# Allegro board DEV_SUB_SENSOR_BRD_V1_1-20170606.brd
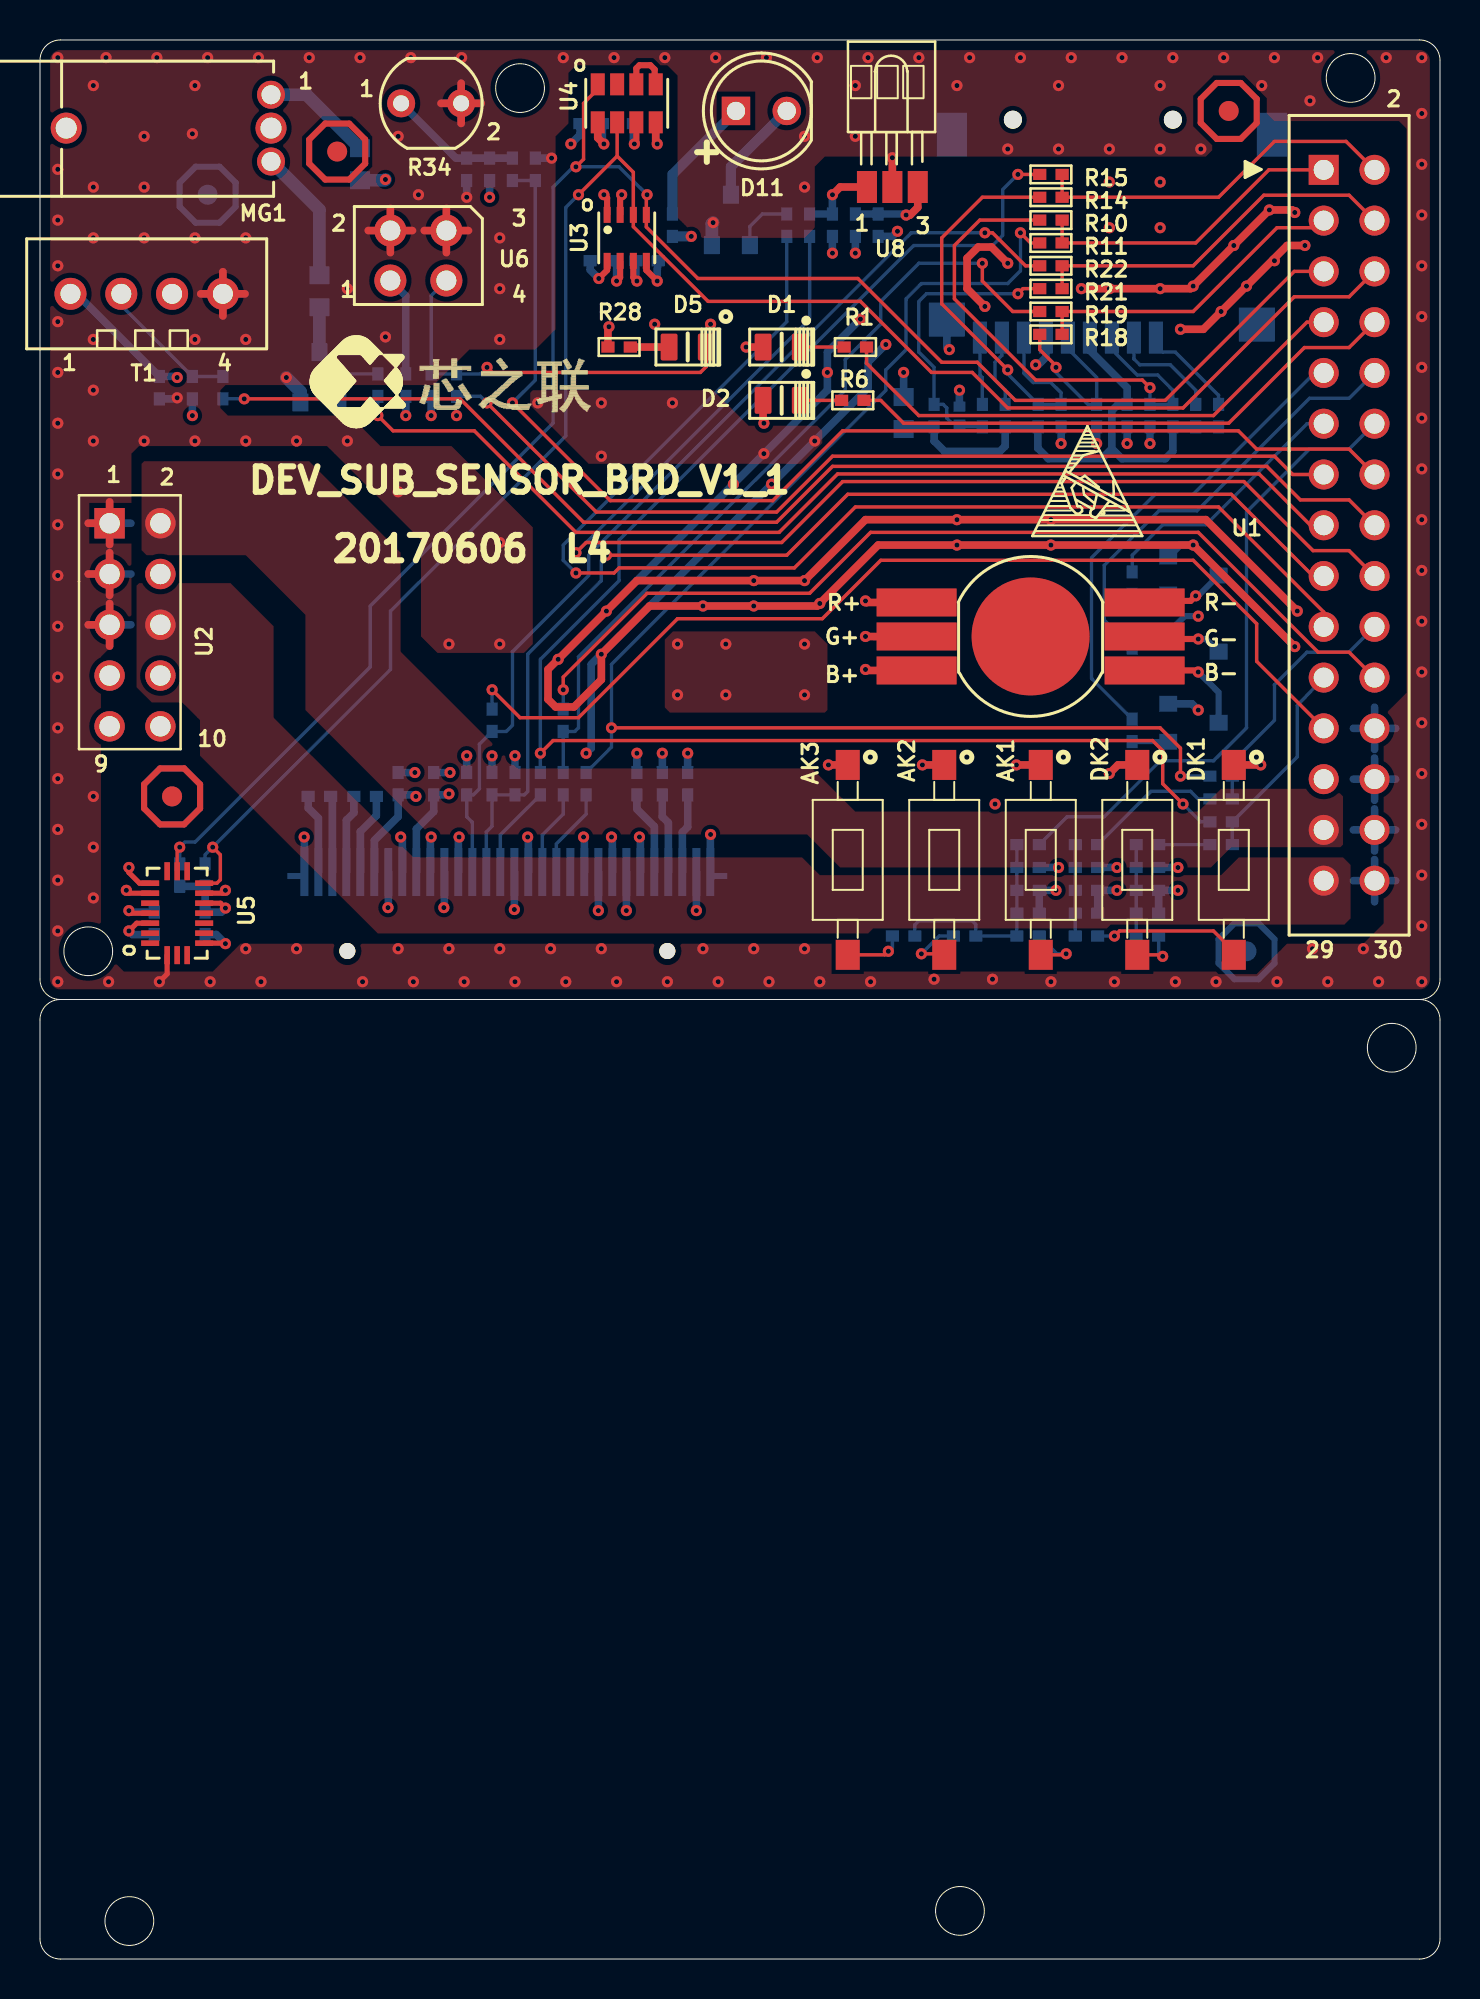
[diagram p0: board, top side]
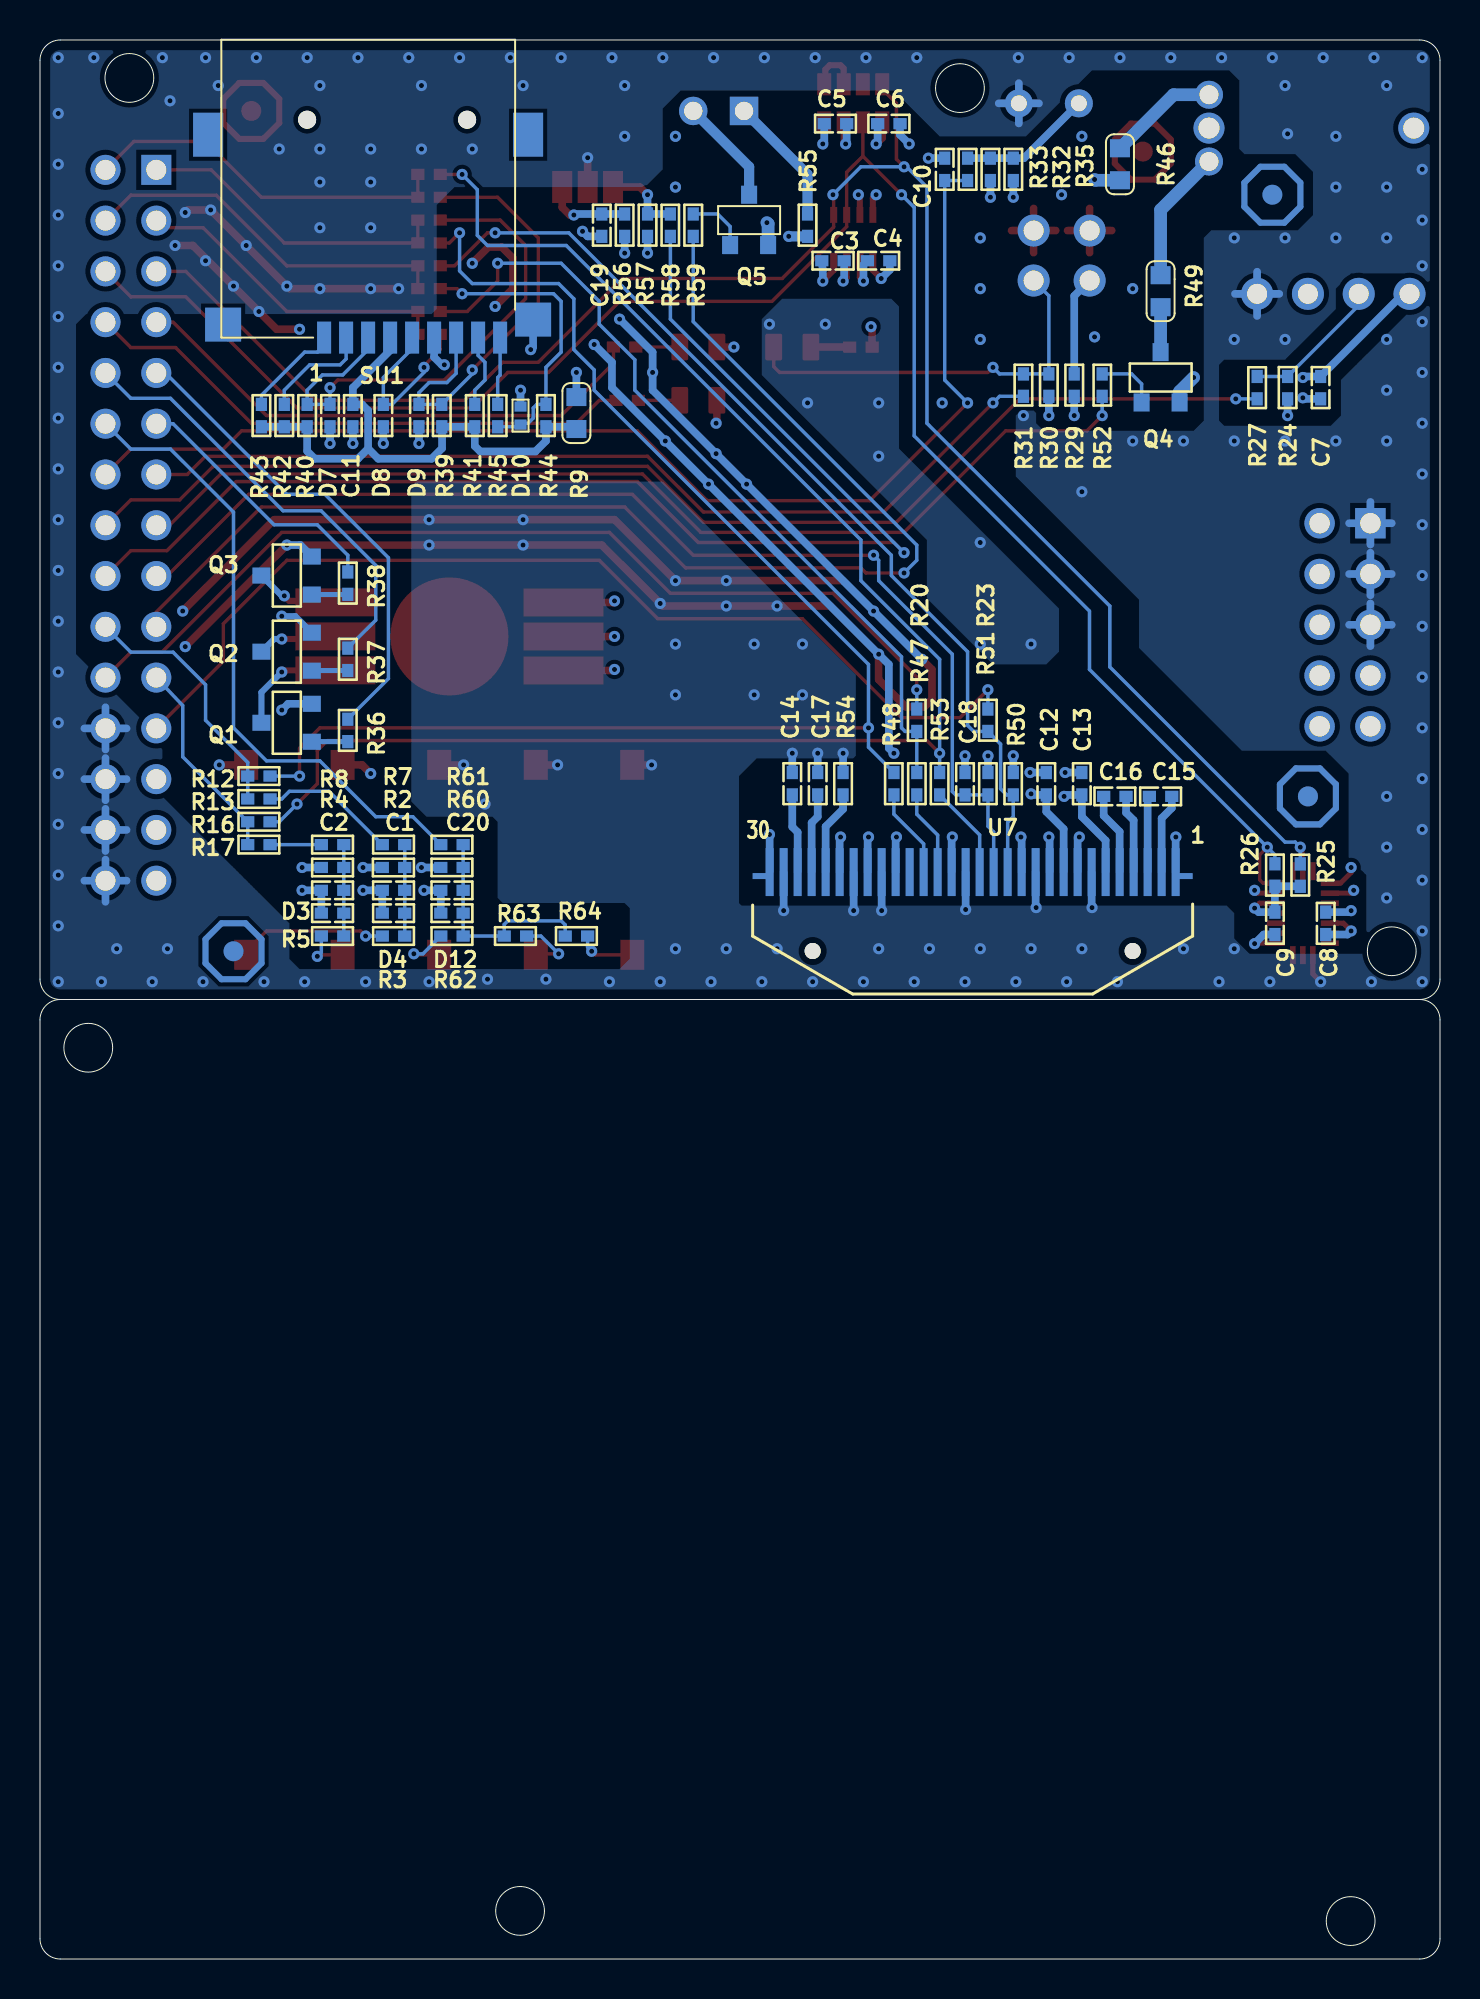
[diagram p1: board, bottom side, seen from below]

Outline 70 x 96 mm; copper layers: TOP, GND02, PWR03, BOTTOM. Coordinates in mm from the lower left corner of the outline.
Outline path: circle c2.41,50.41 r1.22 ; circle c4.47,1.9 r1.22 ; circle c24,93.59 r1.22 ; circle c46,2.41 r1.22 ; circle c65.53,94.1 r1.22 ; circle c67.59,45.59 r1.22 ; 1.02,48 arc(0.3,47.7) 0,46.98 0,1.02 arc(0.3,0.3) 1.02,0 68.98,0 arc(69.7,0.3) 70,1.02 70,46.98 arc(69.7,47.7) 68.98,48 ; 1.02,48 arc(0.3,48.3) 0,49.02 0,94.98 arc(0.3,95.7) 1.02,96 68.98,96 arc(69.7,95.7) 70,94.98 70,49.02 arc(69.7,48.3) 68.98,48 ; 1.02,48 68.98,48 ; 1.02,48 68.98,48

## Placement (name value [footprint] x y rotation side)
AK1  -  [KEY-2]  50.04 54.98 270 top
AK2  -  [KEY-2]  45.21 54.98 270 top
AK3  -  [KEY-2]  40.39 54.98 270 top
C1  104  [C0402]  52.32 53.46 180 bottom
C2  104  [C0402]  55.37 53.46 180 bottom
C3  100nF-NC  [C0402]  30.35 84.96 180 bottom
C4  100nF-NC  [C0402]  28.07 84.96 180 bottom
C5  1uF-NC  [C0402]  30.23 91.81 0 bottom
C6  1uF-NC  [C0402]  27.56 91.81 0 bottom
C7  100nF-NC  [C0402]  5.97 78.61 90 bottom
C8  100nF-NC  [C0402]  5.71 51.81 270 bottom
C9  100nF-NC  [C0402]  8.26 51.81 90 bottom
C10  100nF-NC  [C0402]  24.77 89.53 270 bottom
C11  104  [C0402]  54.36 77.21 90 bottom
C12  1uF-NC  [C0402]  19.68 58.79 270 bottom
C13  1uF-NC  [C0402]  17.91 58.79 270 bottom
C14  4.7uF-NC  [C0402]  32.39 58.79 270 bottom
C15  1uF-NC  [C0402]  13.97 58.16 180 bottom
C16  1uF-NC  [C0402]  16.26 58.16 180 bottom
C17  4.7uF-NC  [C0402]  31.11 58.79 270 bottom
C18  4.7uF-NC  [C0402]  23.75 58.79 270 bottom
C19  104  [C0402]  41.91 86.73 90 bottom
C20  104  [C0402]  49.4 53.46 180 bottom
D1  RED  [LED0805]  37.08 80.64 180 top
D2  RED  [LED0805]  37.08 77.97 180 top
D3  ESD9B5VL-2/TR  [C0402]  55.37 52.32 0 bottom
D4  ESD9B5VL-2/TR  [C0402]  52.32 52.32 0 bottom
D5  RED  [LED0805]  32.39 80.64 180 top
D6  LED-3  [LED6P2B14_4X8H5_2]  49.53 66.16 0 top
D7  ESD9B5VL-2/TR  [C0402]  55.5 77.21 270 bottom
D8  ESD9B5VL-2/TR  [C0402]  52.83 77.21 270 bottom
D9  ESD9B5VL-2/TR  [C0402]  51.05 77.21 270 bottom
D10  ESD9B5V-2/TR  [TVS0402]  45.97 77.21 90 bottom
D11  IR_TX  [IR-LED]  34.8 92.45 90 top
D12  ESD9B5VL-2/TR  [C0402]  49.4 52.32 0 bottom
DK1  -  [KEY-2]  59.69 54.98 270 top
DK2  -  [KEY-2]  54.86 54.98 270 top
MG1  LX0610C  [RD6Z66_142]  6.43 91.59 0 top
NOREF  -  []  0 48 90 top
NOREF#2  -  [unnamed#2]  14.86 90.42 0 top
NOREF#3  -  []  65.13 0 90 top
NOREF#4  -  [unnamed#2]  6.6 58.16 0 top
NOREF#5  -  []  65.45 48 0 top
NOREF#6  -  []  0 71.42 0 top
NOREF#7  -  [unnamed#2]  59.44 92.45 0 top
NOREF#8  -  [unnamed#2]  8.38 88.26 180 bottom
NOREF#9  -  [unnamed#2]  6.6 58.16 180 bottom
NOREF#10  -  [unnamed#2]  60.33 50.41 180 bottom
Q1  BSN20  [SOT-23]  57.66 61.84 0 bottom
Q2  BSN20  [SOT-23]  57.66 65.4 0 bottom
Q3  BSN20  [SOT-23]  57.66 69.21 0 bottom
Q4  S8050  [SOT-23]  13.97 79.11 90 bottom
Q5  BSN20  [SOT-23]  34.54 86.99 90 bottom
R1  2K-NC  [R0402]  40.77 80.64 180 top
R2  10K-NC  [R0402]  52.32 54.6 180 bottom
R3  0R  [R0402]  52.32 51.17 0 bottom
R4  10K-NC  [R0402]  55.37 54.6 180 bottom
R5  0R  [R0402]  55.37 51.17 0 bottom
R6  2K-NC  [R0402]  40.64 77.97 180 top
R7  0R-NC  [R0402]  52.32 55.75 180 bottom
R8  0R-NC  [R0402]  55.37 55.75 180 bottom
R9  0R  [R0603]  43.18 77.34 270 bottom
R10  0R  [R0402]  50.55 86.99 0 top
R11  0R  [R0402]  50.55 85.85 0 top
R12  NC-0R  [R0402]  59.05 59.18 0 bottom
R13  0R  [R0402]  59.05 58.03 0 bottom
R14  0R  [R0402]  50.55 88.13 0 top
R15  0R  [R0402]  50.55 89.27 0 top
R16  NC-0R  [R0402]  59.05 56.89 0 bottom
R17  0R  [R0402]  59.05 55.75 0 bottom
R18  0R  [R0402]  50.55 81.27 0 top
R19  0R  [R0402]  50.55 82.42 0 top
R20  NC-0R  [R0402]  26.16 61.97 90 bottom
R21  0R  [R0402]  50.55 83.56 0 top
R22  0R  [R0402]  50.55 84.7 0 top
R23  NC-0R  [R0402]  22.61 61.97 90 bottom
R24  5K1-NC  [R0402]  7.62 78.61 270 bottom
R25  4K7-NC  [R0402]  6.98 54.22 270 bottom
R26  4K7-NC  [R0402]  8.26 54.23 270 bottom
R27  1K-NC  [R0402]  9.14 78.61 270 bottom
R28  1K-NC  [R0402]  28.96 80.64 180 top
R29  100R-NC  [R0402]  18.29 78.73 270 bottom
R30  10K-NC  [R0402]  19.56 78.73 270 bottom
R31  1K-NC  [R0402]  20.83 78.73 270 bottom
R32  10K-NC  [R0402]  22.48 89.53 270 bottom
R33  1K-NC  [R0402]  23.62 89.53 270 bottom
R34  GL55  [RD2Z51_43]  19.56 92.83 0 top
R35  10K-NC  [R0402]  21.34 89.53 90 bottom
R36  1K  [R0402]  54.61 61.46 90 bottom
R37  1K  [R0402]  54.61 65.02 90 bottom
R38  1K  [R0402]  54.61 68.83 90 bottom
R39  10K  [R0402]  49.91 77.21 90 bottom
R40  10K  [R0402]  56.64 77.21 90 bottom
R41  10K  [R0402]  48.26 77.21 90 bottom
R42  10K  [R0402]  57.79 77.21 90 bottom
R43  10K  [R0402]  58.93 77.21 90 bottom
R44  47K  [R0402]  44.7 77.21 90 bottom
R45  NC-0R  [R0402]  47.12 77.21 90 bottom
R46  0R  [R0603]  16 89.78 270 bottom
R47  100R-NC  [R0402]  26.16 58.79 270 bottom
R48  100R-NC  [R0402]  27.3 58.79 270 bottom
R49  0R  [R0603]  13.97 83.43 270 bottom
R50  10K-NC  [R0402]  21.34 58.79 270 bottom
R51  10K-NC  [R0402]  22.6 58.79 270 bottom
R52  1K-NC  [R0402]  16.89 78.73 90 bottom
R53  100R-NC  [R0402]  25.02 58.79 270 bottom
R54  910K-NC  [R0402]  29.84 58.79 90 bottom
R55  1K  [R0402]  31.62 86.73 270 bottom
R56  33R  [R0402]  40.77 86.73 270 bottom
R57  10K  [R0402]  39.62 86.73 270 bottom
R58  0R-NC  [R0402]  38.48 86.73 270 bottom
R59  1K  [R0402]  37.34 86.73 270 bottom
R60  10K  [R0402]  49.4 54.6 180 bottom
R61  0R-NC  [R0402]  49.4 55.75 0 bottom
R62  1K8  [R0402]  49.4 51.17 180 bottom
R63  4K7  [R0402]  46.23 51.17 0 bottom
R64  10K  [R0402]  43.18 51.17 0 bottom
SU1  MICROSD/TF_SLOT  [TF9P]  53.59 92.01 0 bottom
T1  DHT11  [RD4B55_12H155]  5.33 83.3 0 top
U1  DIP-30  [IDC-30]  65.46 71.72 270 top
U2  DIP-10  [IDC-10]  4.75 66.75 0 top
U3  BME280  [MIC8B250_250H93]  29.34 86.1 0 top
U4  APDS9930  [MIC8B336_494H140]  29.34 92.83 0 top
U5  BMX055  [MIC20B30_45H10]  6.86 52.32 90 top
U6  RPR220  [RD4B49_64H65]  18.92 85.22 0 top
U7  OLED  [LED_128X64]  23.37 54.17 0 bottom
U8  IR_RX  [IR]  37.34 91.81 0 top

## Library data of the parts
AK1-AK3 DK1 DK2 = KEY-2
C1-C10 C12-C20 = CAPACITOR_0
C11 = CAPACITOR_0: room: site1
D1 D2 D5 = LED_1: User Part Number: LED0805; Tolerance: RichardLC
D3 D4 D10 D12 = 1_1.5KE100A
D6 = LED-3
D7-D9 = 1_1.5KE100A: room: site1
D11 = IR_TX
MG1 = MOTOR SERVO
Q1-Q3 Q5 = NMOS_0
Q4 = NPN
R1 R6 R24-R33 R35 R47 R48 R50 R51 R53 R54 = R1_0805: room: DRAM
R2-R5 R7 R8 R52 R61 = R1 0805
R9-R23 R46 R49 = R1_0805
R34 = GL55_1
R36-R38 R44 R55-R60 R62-R64 = R
R39-R43 = R: room: site1
R45 = R1_0805: room: site1
SU1 = SDMMC SLOT_11: room: site1
T1 = DHT11
U1 = DIP-30
U2 = DIP-10
U3 = BME280_0
U4 = APDS9930
U5 = BMX055_0
U6 = DIP-4
U7 = OLED_1
U8 = IR_Module_0

## Footprints (pads in the part's own frame, mm; a bottom-side part is the same pattern mirrored in y, then rotated)
C0402
  rect 0.66x0.56 smd: 1(-0.56,0) 2(0.56,0)
IDC-10
  rect 1.52x1.52 hole 1.02: 1(-1.27,5.08)
  round 1.52 hole 1.02: 2(1.27,5.08) 3(-1.27,2.54) 4(1.27,2.54) 5(-1.27,0) 6(1.27,0) 7(-1.27,-2.54) 8(1.27,-2.54) 9(-1.27,-5.08) 10(1.27,-5.08)
IDC-30
  rect 1.5x1.5 hole 1: 1(-17.78,-1.27)
  round 1.5 hole 1: 2(-17.78,1.27) 3(-15.24,-1.27) 4(-15.24,1.27) 5(-12.7,-1.27) 6(-12.7,1.27) 7(-10.16,-1.27) 8(-10.16,1.27) 9(-7.62,-1.27) 10(-7.62,1.27) 11(-5.08,-1.27) 12(-5.08,1.27) 13(-2.54,-1.27) 14(-2.54,1.27) 15(0,-1.27) 16(0,1.27) 17(2.54,-1.27) 18(2.54,1.27) 19(5.08,-1.27) 20(5.08,1.27) 21(7.62,-1.27) 22(7.62,1.27) 23(10.16,-1.27) 24(10.16,1.27) 25(12.7,-1.27) 26(12.7,1.27) 27(15.24,-1.27) 28(15.24,1.27) 29(17.78,-1.27) 30(17.78,1.27)
IR
  rect 1x1.6 smd: 1(4.01,-3.17) 2(5.28,-3.17) 3(6.55,-3.17)
IR-LED
  rect 1.422x1.422 hole 0.914: 1(0,0)
  round 1.422 hole 0.914: 2(0,-2.54)
KEY-2
  rect 1.5x1.2 smd: 1(-4.75,0) 2(4.75,0)
LED6P2B14_4X8H5_2
  round 5.9 smd: (0,0)
  rect 4x1.4 smd: 1(-5.7,1.7) 2(-5.7,0) 3(-5.7,-1.7) 4(5.7,-1.7) 5(5.7,0) 6(5.7,1.7)
LED0805
  custom 0.84x1.34 smd: A(0.93,0) C(-0.93,0)
LED_128X64
  round 0.8 hole 0.8 unplated: (-8,3.75) (8,3.75)
  rect 0.4x2.4 smd: 1(-10.15,-0.2) 2(-9.45,-0.2) 3(-8.75,-0.2) 4(-8.05,-0.2) 5(-7.35,-0.2) 6(-6.65,-0.2) 7(-5.95,-0.2) 8(-5.25,-0.2) 9(-4.55,-0.2) 10(-3.85,-0.2) 11(-3.15,-0.2) 12(-2.45,-0.2) 13(-1.75,-0.2) 14(-1.05,-0.2) 15(-0.35,-0.2) 16(0.35,-0.2) 17(1.05,-0.2) 18(1.75,-0.2) 19(2.45,-0.2) 20(3.15,-0.2) 21(3.85,-0.2) 22(4.55,-0.2) 23(5.25,-0.2) 24(5.95,-0.2) 25(6.65,-0.2) 26(7.35,-0.2) 27(8.05,-0.2) 28(8.75,-0.2) 29(9.45,-0.2) 30(10.15,-0.2)
MIC8B250_250H93
  rect 0.35x0.8 smd: 1(-0.98,1.15) 2(-0.33,1.15) 3(0.33,1.15) 4(0.98,1.15) 5(0.98,-1.15) 6(0.33,-1.15) 7(-0.33,-1.15) 8(-0.98,-1.15)
MIC8B336_494H140
  rect 0.7x1.1 smd: 1(-1.45,0.95) 2(-0.48,0.95) 3(0.48,0.95) 4(1.45,0.95) 5(1.45,-0.95) 6(0.48,-0.95) 7(-0.48,-0.95) 8(-1.45,-0.95)
MIC20B30_45H10
  rect 0.28x0.9 smd: 1(-1.5,1.35) 2(-1,1.35) 3(-0.5,1.35) 4(0,1.35) 5(0.5,1.35) 6(1,1.35) 7(1.5,1.35) 11(1.5,-1.35) 12(1,-1.35) 13(0.5,-1.35) 14(0,-1.35) 15(-0.5,-1.35) 16(-1,-1.35) 17(-1.5,-1.35)
  rect 0.9x0.28 smd: 8(2.1,0.5) 9(2.1,0) 10(2.1,-0.5) 18(-2.1,-0.5) 19(-2.1,0) 20(-2.1,0.5)
R0402
  rect 0.66x0.56 smd: 1(-0.56,0) 2(0.56,0)
R0603
  rect 0.9x1 smd: 1(-0.8,0) 2(0.8,0)
RD2Z51_43
  round 1.4 hole 0.8: 1(-1.5,0) 2(1.5,0)
RD4B49_64H65
  round 1.6 hole 1: 1(-1.4,-1.25) 2(-1.4,1.25) 3(1.4,1.25) 4(1.4,-1.25)
RD4B55_12H155
  round 1.6 hole 1: 1(-3.81,0) 2(-1.27,0) 3(1.27,0) 4(3.81,0)
RD6Z66_142
  round 1.55 hole 1.05: (-5.12,0) (5.12,0)
  round 1.4 hole 0.95: 1(5.12,1.67) 2(5.12,-1.67)
SOT-23
  rect 0.9x0.8 smd: 1(-1.25,0.95) 2(-1.25,-0.95) 3(1.27,0)
TF9P
  rect 1.5x2.2 smd: (-8,0.75) (8,0.75)
  round 0.9 hole 0.9 unplated: (-4.95,0) (3.05,0)
  rect 1.8x1.7 smd: (7.25,10.25) 10(-8.25,10)
  rect 0.7x1.6 smd: 1(2.2,10.9) 2(1.1,10.9) 3(0,10.9) 4(-1.1,10.9) 5(-2.2,10.9) 6(-3.3,10.9) 7(-4.4,10.9) 8(-5.5,10.9) 9(-6.6,10.9)
TVS0402
  rect 0.5x0.6 smd: 1(-0.45,0) 2(0.45,0)
unnamed#2
  round 1 smd: 1(0,0)

## Nets
GND: AK1.1 AK2.1 AK3.1 C1.1 C2.1 C3.1 C4.1 C5.1 C6.1 C7.1 C8.1 C9.1 C10.1 C11.1 C12.1 C13.1 C14.1 C17.1 C18.1 C19.1 C20.1 D3.2(CATHODE) D4.2(CATHODE) D7.2(CATHODE) D8.2(CATHODE) D9.2(CATHODE) D10.2(CATHODE) D12.2(CATHODE) DK1.1 DK2.1 Q1.2(SOURCE) Q2.2(SOURCE) Q3.2(SOURCE) Q4.2(E) Q5.2(SOURCE) R34.2 R35.1 R54.2 SU1.6(VSS2) SU1.10(GND) T1.4(GND) U1.24 U1.26 U1.28 U1.30 U2.1 U2.3 U2.5 U3.1(GND) U3.5(SDO) U3.7(GND1) U4.6(GND) U5.4(GNDA) U5.6(GNDIO) U5.12(SDO2) U5.17(SDO1) U5.20(CSB3) U6.2 U6.3 U7.1(NC1) U7.7(NC2) U7.8(VSS) U7.10(NC3) U7.11(BS1) U7.12(BS2) U7.16(R/W) U7.17(E/RD) U7.21(D3) U7.22(D4) U7.23(D5) U7.24(D6) U7.25(D7) U7.29(NC4) U7.30(NC5) U8.2(GND)
VCC-1V8: U1.29 U2.6
VCC-3V3: C3.2 C4.2 C5.2 C6.2 C7.2 C8.2 C9.2 C12.2 C13.2 D1.A(ANODE) D2.A(ANODE) D6.1(R+) D6.2(G+) D6.3(B+) R2.1 R4.1 R9.1 R24.2 R25.2 R26.2 R28.2 R29.2 R30.2 R32.2 R46.2 R50.1 R51.1 R55.2 R56.2 R57.2 R60.1 T1.1(VCC) U1.25 U2.4 U3.2(CSB) U3.6(VDDIO) U3.8(VDD) U4.5(LEDA) U4.8(VDD) U5.3(VDD) U5.7(PS) U5.13(VDDIO) U7.6(VBAT) U7.9(VDD)
VCC-5V: U1.27 U2.2
VCC-CARD: C11.2 R9.2 R39.1 R40.1 R41.1 R42.1 R43.1 R44.1 SU1.4(VDD)
AKEY: R61.2 U1.12
DHT: R27.2 U1.16
DKEY1: R7.1 R13.1
DKEY2: R8.1 R17.1
IR-RX: R58.2 U1.18
IR-TX: R59.2 U1.19
M-CTRL: R52.1 U1.15
PA0: R10.2 R11.2 U1.1
PA1: R14.2 R15.2 U1.2
PA2: R18.2 R19.2 U1.3
PA3: R21.2 R22.2 U1.4
PA6: R1.1 U1.7
PA7: R6.1 U1.8
PA12: R31.2 U1.13
PA13: C10.2 R33.2 U1.14
PA19: R12.2 R13.2 U1.20
PA20: R16.2 R17.2 U1.21
PA21: R20.2 U1.22
PA22: R23.2 U1.23
PWM0: R36.2 U1.9
PWM1: R37.2 U1.10
PWM2: R38.2 U1.11
RESET: C18.2 R51.2 U1.17 U7.14(RESET)
SD-CLK: D8.1(ANODE) R18.1 SU1.5(CLK)
SD-CMD: D7.1(ANODE) R10.1 R40.2 SU1.3(CMD)
SD-DATA0: D9.1(ANODE) R14.1 R39.2 SU1.7(DAT0)
SD-DET: D10.1(ANODE) R21.1 R44.2 R45.1
SPI1-CLK: R19.1 R20.1 R47.1
SPI1-CS0: R22.1 R23.1 R50.2 U7.13(CS)
SPI1-MISO: R15.1 R16.1 R53.1
SPI1-MOSI: R11.1 R12.1 R48.1
TWI0_SCL: R25.1 U1.5 U3.4(SCL/SCK) U4.1(SDA) U5.9(SCX)
TWI0_SDA: R26.1 U1.6 U3.3(SDA/SDI) U4.7(SCL) U5.11(SDX)
N16775838: U4.3(LDR) U4.4(LEDK)
N16777710: R24.1 R27.1 T1.2(DOUT)
N16778707: Q2.1(GATE) R37.1
N16778732: D6.6(R-) Q3.3(DRAIN)
N16778736: D6.4(B-) Q1.3(DRAIN)
N16778741: Q3.1(GATE) R38.1
N16778781: D6.5(G-) Q2.3(DRAIN)
N16778794: Q1.1(GATE) R36.1
N16779519: R29.1 U6.1
N16779567: D5.C(CATHODE) R30.1 R31.1 U6.4
N16780797: R32.1 R33.1 R34.1 R35.2
N16784393: C2.2 D3.1(ANODE) R4.2 R5.1 R8.2
N16784404: DK2.2 R5.2
N16793142: MG1.2(-) R49.1
N16793145: Q4.3(C) R49.2
N16793186: Q4.1(B) R52.2
N16793201: MG1.1(+) R46.1
N16811314: R47.2 U7.18(D0)
N16811316: R48.2 U7.19(D1)
N16811421: C17.2 U7.27(VCOM)
N16811431: R54.1 U7.26(IREF)
N16811468: C14.2 U7.28(VCC)
N16811472: C15.2 U7.2(C2P)
N16811474: C15.1 U7.3(C2N)
N16811480: C16.2 U7.4(C1P)
N16811482: C16.1 U7.5(C1N)
N16811488: R53.2 U7.15(D/C)
N16813055: D2.C(CATHODE) R6.2
N16813242: C19.2 R56.1 U8.3(VCC)
N16813244: R57.1 R58.1 U8.1(OUT)
N16813276: D11.2 Q5.3(DRAIN)
N16813278: D11.1 R55.1
N16817130: Q5.1(GATE) R59.1
N16820558: AK1.2 R62.1
N16820749: C20.2 D12.1(ANODE) R60.2 R61.1 R62.2 R63.2 R64.2
N16821069: AK2.2 R63.1
N16821170: AK3.2 R64.1
N16823097: C1.2 D4.1(ANODE) R2.2 R3.1 R7.2
N16823114: DK1.2 R3.2
N16823959: D1.C(CATHODE) R1.2
N16827041: R45.2 SU1.9(CD#)
N16827522: R43.2 SU1.1(DAT2)
N16827527: R42.2 SU1.2(DAT3)
N16827532: R41.2 SU1.8(DAT1)
N167793910: D5.A(ANODE) R28.1

Pads without a net: NOREF#2 1; NOREF#4 1; NOREF#7 1; NOREF#8 1; NOREF#9 1; NOREF#10 1; T1 3; U2 7 8 9 10; U4 2; U5 1 2 5 8 10 14 15 16 18 19; U7 20

## Via types
v1: diameter 0.559, hole 0.254, TOP to BOTTOM, 323 vias

## Routing (per net, layer and track width the routed paths; a pad name or vN(x,y) marks a point on that pad's centre or on a via; arc(x,y) is an arc through that point)
GND: length 352.5
  TOP w0.254: U5.20 6.36,49.28 v1(5.97,48.89) ; v1(4.44,52.44) 4.57,52.32 U5.4 ; v1(9.27,50.79) 9.25,50.82 U5.17 ; U5.6 4.46,53.32 v1(4.32,53.46) ; U5.12 9.13,53.32 v1(9.27,53.46)
  TOP w0.305: U3.5 30.32,84.48 v1(30.86,83.94) ; v1(28.19,88.26) 28.36,88.1 U3.1 ; v1(29.72,90.8) 29.82,90.9 U4.6 ; v1(28.83,83.94) 29.01,84.12 U3.7
  TOP w0.381: 19.21,86.47 U6.3 ; U6.3 20.32,85.36 ; U6.3 20.32,87.57 ; U6.3 21.42,86.47 ; 3.48,70.76 U2.1 ; U2.1 3.48,72.89 ; U2.1 2.41,71.83 ; T1.4 9.14,84.41 ; T1.4 8.04,83.3 ; T1.4 9.14,82.2 ; T1.4 10.25,83.3 ; v1(62.74,65.65) v1(57.66,70.73) v1(50.55,70.73) v1(45.85,70.73) 41.91,70.73 v1(38.99,67.81) 38.86,67.68 v1(35.69,67.68) v1(33.15,67.68) 30.48,67.68 v1(28.07,65.27) 28.07,64 26.7,62.64 25.78,62.64 25.4,63.02 25.4,64.51 v1(25.91,65.02) v1(28.32,67.43) 29.84,68.95 v1(35.69,68.95) v1(38.23,68.95) 41.28,72 v1(45.85,72) v1(50.55,72) 58.29,72 v1(62.87,67.43) ; 16.41,86.47 U6.2 ; U6.2 17.52,85.36 ; U6.2 18.62,86.47 ; U6.2 17.52,87.57 ; R34.2 22.06,92.83 ; R34.2 21.06,93.84 ; R34.2 21.06,91.83 ; R34.2 20.05,92.83 ; AK3.1 v1(39.42,59.73) ; 2.41,69.29 U2.3 ; U2.3 3.48,68.22 ; U2.3 3.48,70.35 ; U2.5 3.48,67.81 ; U2.5 2.41,66.75 ; U2.5 3.48,65.68 ; DK2.1 53.9,59.73 v1(53.47,59.3) ; AK1.1 v1(48.82,59.73) ; U8.2 v1(42.62,90.11) ; v1(57.02,81.53) 58.17,81.53 v1(59.05,82.42) v1(60.33,83.69) 62.36,85.72 v1(63.25,85.72) ; AK2.1 v1(44.12,59.73) ; v1(62.74,87.37) 62.61,87.5 v1(61.47,87.5) v1(59.69,85.72) v1(57.66,83.69) 57.53,83.56 v1(56.01,83.56) v1(53.47,83.56) v1(52.07,83.56) ; DK1.1 v1(61.04,59.73)
  GND02 w0.381: 19.21,86.47 U6.3 ; U6.3 20.32,85.36 ; U6.3 21.42,86.47 ; U6.3 20.32,87.57 ; 65.67,59.02 U1.26 ; U1.26 66.73,57.97 ; U1.26 67.78,59.02 ; U1.26 66.73,60.08 ; 2.41,66.75 U2.5 ; U2.5 3.48,67.81 ; U2.5 3.48,65.68 ; U2.5 4.55,66.75 ; U1.30 66.73,55 ; U1.30 66.73,52.89 ; U1.30 67.78,53.94 ; U1.30 65.67,53.94 ; 9.14,82.2 T1.4 ; T1.4 9.14,84.41 ; T1.4 10.25,83.3 ; T1.4 8.04,83.3 ; 3.48,70.76 U2.1 ; U2.1 2.41,71.83 ; U2.1 3.48,72.89 ; U2.1 4.55,71.83 ; U1.24 67.78,61.56 ; U1.24 66.73,62.62 ; U1.24 65.67,61.56 ; U1.24 66.73,60.51 ; 20.05,92.83 R34.2 ; R34.2 22.06,92.83 ; R34.2 21.06,93.84 ; R34.2 21.06,91.83 ; U1.28 67.78,56.48 ; U1.28 66.73,55.43 ; U1.28 65.67,56.48 ; U1.28 66.73,57.54 ; 16.41,86.47 U6.2 ; U6.2 18.62,86.47 ; U6.2 17.52,85.36 ; U6.2 17.52,87.57 ; 3.48,68.22 U2.3 ; U2.3 4.55,69.29 ; U2.3 2.41,69.29 ; U2.3 3.48,70.35
  BOTTOM w0.305: Q2.2 57.24,67.18 v1(57.91,67.18)
  BOTTOM w0.381: v1(27.3,60.32) 27.56,60.57 27.56,64.76 v1(28.07,65.27) v1(36.58,73.78) v1(38.73,75.94) 41.4,78.61 41.4,79.88 v1(42.29,80.77) ; U7.30 33.52,56.24 v1(33.53,56.25) ; R34.2 21.06,93.84 ; R34.2 21.06,91.83 ; R34.2 20.05,92.83 ; R34.2 22.06,92.83 ; C4.1 28.83,84.75 v1(28.83,83.94) ; v1(53.85,53.46) C1.1 D4.2 ; SU1.10 45.34,80.63 v1(45.47,80.51) ; 3.48,70.76 U2.1 ; U2.1 3.48,72.89 ; U2.1 2.41,71.83 ; U2.1 4.55,71.83 ; 66.73,60.51 U1.24 ; U1.24 67.78,61.56 ; U1.24 66.73,62.62 ; U1.24 65.67,61.56 ; U1.28 67.78,56.48 ; U1.28 65.67,56.48 ; U1.28 66.73,57.54 ; U1.28 66.73,55.43 ; SU1.6 50.29,80.13 49.91,79.75 v1(49.78,79.75) ; v1(56.9,53.46) C2.1 D3.2 ; C13.1 v1(18.74,59.35) ; U7.24 v1(29.32,52.45) ; C9.1 8.82,51.25 v1(9.27,50.79) ; v1(6.86,78.1) 6.81,78.05 C7.1 ; 2.41,69.29 U2.3 ; U2.3 3.48,68.22 ; U2.3 3.48,70.35 ; U2.3 4.55,69.29 ; C14.1 v1(32.39,60.32) ; v1(27.18,56.13) 27.22,56.09 U7.21 ; v1(17.4,52.6) 17.42,52.62 U7.7 ; C17.1 v1(31.11,60.32) ; 65.67,53.94 U1.30 ; U1.30 66.73,52.89 ; U1.30 66.73,55 ; U1.30 67.78,53.94 ; T1.4 9.14,84.41 ; T1.4 10.25,83.3 ; T1.4 9.14,82.2 ; T1.4 8.04,83.3 ; v1(30.86,83.94) 30.86,84.5 C3.1 ; U7.23 28.62,56.08 v1(28.57,56.13) ; C12.1 v1(20.5,59.35) ; U1.26 67.78,59.02 ; U1.26 65.67,59.02 ; U1.26 66.73,60.08 ; U1.26 66.73,57.97 ; D9.2 v1(51.05,75.81) ; U2.5 3.48,67.81 ; U2.5 4.55,66.75 ; U2.5 3.48,65.68 ; U2.5 2.41,66.75 ; C10.1 v1(25.58,90.09) ; v1(24.38,56.13) 24.42,56.09 U7.17 ; C11.1 v1(54.36,75.81) ; Q1.2 57.6,62.79 v1(57.91,62.48) ; D12.2 C20.1 v1(50.8,53.46) ; v1(25.91,65.02) v1(28.32,67.43) v1(34.67,73.78) v1(36.2,75.3) 39.37,78.48 v1(39.37,79.37) 39.37,80.38 v1(41.02,82.04) ; C19.1 42.62,86.17 v1(42.87,86.43) ; C8.1 4.52,52.37 v1(4.44,52.44) ; U7.29 v1(32.82,52.45) ; R35.1 v1(21.34,88.13) ; v1(57.66,70.73) 56.98,70.73 Q3.2 ; U7.11 20.22,52.57 v1(20.19,52.6) ; U7.8 18.12,56.04 v1(18.03,56.13) ; U7.25 30.02,56.08 v1(29.97,56.13) ; D7.2 v1(55.5,75.81) ; U7.22 v1(27.92,52.45) ; C6.1 27,91.25 v1(26.54,90.8) ; U7.1 13.22,56.12 v1(13.21,56.13) ; D10.2 v1(45.97,78.48) ; U7.10 19.52,56.09 v1(19.56,56.13) ; v1(29.72,90.8) 29.67,90.85 C5.1 ; U7.16 v1(23.72,52.5) ; R54.2 v1(29.84,60.32) ; U7.12 20.92,56.09 v1(20.95,56.13) ; D8.2 v1(52.83,75.81) ; C18.1 v1(23.75,60.19)
  BOTTOM w0.635: Q4.2 13.02,78.41 v1(12.32,79.11) ; Q5.2 33.59,86.8 v1(33.66,86.86)
  vias: v1(0.89,95.12) v1(0.89,89.53) v1(0.89,86.99) v1(0.89,84.7) v1(0.89,81.91) v1(0.89,79.37) v1(0.89,76.83) v1(0.89,74.29) v1(0.89,71.75) v1(0.89,69.21) v1(0.89,66.67) v1(0.89,64.13) v1(0.89,61.59) v1(0.89,59.05) v1(0.89,56.51) v1(0.89,53.97) v1(0.89,51.43) v1(0.89,48.89) v1(2.67,93.72) v1(2.67,88.64) v1(2.67,86.1) v1(2.67,81.02) v1(2.67,78.48) v1(2.67,75.94) v1(2.67,58.16) v1(2.67,55.62) v1(2.67,53.08) v1(3.3,95.12) v1(3.43,48.89) v1(5.21,91.18) v1(5.21,88.64) v1(5.21,86.1) v1(5.21,75.94) v1(5.84,95.12) v1(7.62,91.31) v1(7.75,93.72) v1(7.75,86.1) v1(7.75,81.02) v1(7.75,75.94) v1(8.38,95.12) v1(8.51,48.89) v1(10.29,86.1) v1(10.29,81.02) v1(10.29,75.94) v1(10.29,50.54) v1(10.92,95.12) v1(11.05,48.89) v1(12.83,75.94) v1(12.83,50.54) v1(13.46,95.12) v1(15.37,83.56) v1(15.37,75.94) v1(16,95.12) v1(16.13,48.89) v1(17.27,81.15) v1(17.91,91.18) v1(17.91,73.4) v1(17.91,50.54) v1(18.54,95.12) v1(18.67,48.89) v1(18.92,88.26) v1(20.45,65.78) v1(20.45,50.54) v1(20.83,77.21) v1(21.08,95.12) v1(21.21,48.89) v1(22.99,86.1) v1(22.99,83.56) v1(22.99,81.02) v1(22.99,70.86) v1(22.99,65.78) v1(22.99,50.54) v1(23.75,48.89) v1(24.89,77.84) v1(25.53,50.54) v1(26.16,95.12) v1(26.29,48.89) v1(28.07,77.84) v1(28.07,75.18) v1(28.07,50.54) v1(28.7,95.12) v1(28.83,48.89) v1(30.73,81.78) v1(31.24,95.12) v1(31.37,48.89) v1(31.62,77.84) v1(31.88,65.78) v1(31.88,63.24) v1(33.15,50.54) v1(33.53,81.78) v1(33.78,95.12) v1(33.91,48.89) v1(34.29,65.78) v1(34.29,63.24) v1(35.69,50.54) v1(36.32,95.12) v1(36.45,48.89) v1(38.23,91.18) v1(38.23,88.64) v1(38.23,65.78) v1(38.23,63.24) v1(38.23,50.54) v1(38.86,95.12) v1(38.99,48.89) v1(40.77,93.72) v1(40.77,91.18) v1(41.4,95.12) v1(41.53,48.89) v1(43.94,95.12) v1(44.7,49.02) v1(45.85,93.72) v1(46.48,95.12) v1(47.62,49.02) v1(47.75,57.78) v1(48.39,90.54) v1(49.02,95.12) v1(50.55,48.89) v1(50.93,93.72) v1(50.93,90.54) v1(51.56,95.12) v1(53.47,90.54) v1(53.47,88.89) v1(53.47,86.61) v1(53.72,48.89) v1(54.1,95.12) v1(56.01,93.72) v1(56.01,90.54) v1(56.01,88.89) v1(56.01,86.61) v1(56.64,95.12) v1(56.77,48.89) v1(58.04,90.54) v1(58.8,48.89) v1(59.18,95.12) v1(61.09,93.72) v1(61.72,95.12) v1(61.72,84.96) v1(61.85,48.89) v1(63.5,92.96) v1(63.63,50.54) v1(63.88,95.12) v1(64.39,48.89) v1(66.17,50.54) v1(66.93,48.89) v1(67.31,95.12) v1(69.09,95.12) v1(69.09,92.32) v1(69.09,89.78) v1(69.09,87.24) v1(69.09,84.7) v1(69.09,82.16) v1(69.09,79.62) v1(69.09,77.08) v1(69.09,74.54) v1(69.09,72) v1(69.09,69.46) v1(69.09,66.92) v1(69.09,64.38) v1(69.09,61.84) v1(69.09,59.3) v1(69.09,56.76) v1(69.09,54.22) v1(69.09,51.68) v1(69.09,48.89)
VCC-3V3: length 73.9
  TOP w0.254: U5.3 4.83,51.82 v1(4.44,51.43) ; U5.7 4.98,53.82 4.44,54.35 v1(4.44,54.6) ; v1(9.27,52.57) 9.02,52.82 U5.13
  TOP w0.305: U3.2 29.01,88.18 v1(29.08,88.26) ; U3.6 29.67,84.12 v1(29.84,83.94) ; v1(27.94,84.07) 28.36,84.48 U3.8
  TOP w0.381: D2.A 36.15,76.87 v1(36.2,76.83) ; v1(48.39,84.83) 47.58,85.64 46.91,85.64 46.36,85.08 46.36,83.56 v1(47.24,82.67) ; D1.A v1(35.31,80.64) ; v1(41.28,67.94) 41.35,67.86 D6.1 ; v1(41.28,66.16) 43.8,66.13 D6.2 ; v1(41.28,64.51) 41.32,64.46 D6.3 ; U4.8 27.89,91.11 v1(28.19,90.8) ; U4.5 30.79,90.87 v1(30.86,90.8) ; R28.2 28.4,81.6 v1(28.45,81.65)
  PWR03 w0.381: 6.02,68.22 U2.4 ; U2.4 6.02,70.35 ; U2.4 4.95,69.29 ; U2.4 7.09,69.29 ; 64.19,57.97 U1.25 ; U1.25 64.19,60.08 ; U1.25 65.24,59.02 ; U1.25 63.13,59.02
  BOTTOM w0.381: R56.2 v1(40.77,85.34) ; C5.2 30.79,90.87 v1(30.86,90.8) ; U7.9 18.82,56.53 19.68,57.4 C12.2 20.39,58.23 v1(20.45,58.29) ; R9.1 v1(43.18,79.37) ; v1(18.8,58.16) 18.72,58.23 C13.2 17.91,57.14 16.72,55.95 U7.6 ; v1(27.94,84.07) 27.51,84.5 C4.2 ; v1(28.19,90.8) 28.12,90.87 C6.2 ; C8.2 4.62,51.25 v1(4.44,51.43) ; v1(9.27,52.57) 9.07,52.37 C9.2 R26.2 8.25,53.66 R25.2 ; R32.2 v1(22.48,88.13) ; R30.2 v1(19.56,77.21) ; v1(29.84,83.94) 29.79,83.99 C3.2 ; v1(50.93,54.6) R60.1 ; R51.1 v1(22.6,60.19) ; v1(6.86,79.11) 6.81,79.17 C7.2 1.84,83.3 T1.1 ; v1(53.85,54.6) R2.1 ; R29.2 v1(18.29,77.21) ; v1(56.9,54.6) R4.1 ; R24.2 v1(7.62,77.21) ; R57.2 v1(39.62,85.34) ; R50.1 v1(21.34,60.19)
  BOTTOM w0.508: R55.2 v1(32.56,86.17)
  BOTTOM w0.635: v1(17.27,89.02) 17.23,88.98 R46.2
VCC-CARD: length 27.8
  BOTTOM w0.381: R43.1 R42.1 R40.1 56.64,75.43 56.26,75.05 54.1,75.05 53.59,75.56 ; 53.59,75.56 53.59,77.46 53.9,77.77 C11.2 54.36,78.61 52.49,80.47 SU1.4 ; 53.59,75.56 53.09,75.05 50.42,75.05 49.9,75.57 49.9,76.63 R39.1 R41.1 48.26,75.69 47.99,75.42 45.23,75.42 44.7,75.94 R44.1 43.29,76.65 R9.2
AKEY: length 31.8
  BOTTOM w0.17: R61.2 51.36,57.14 53.21,57.14 56.01,59.94 58.67,59.94 60.33,61.59 60.33,72.38 63.47,75.53 65.46,75.53 U1.12
DHT: length 62.5
  TOP w0.17: U1.16 65.46,72.99 63.02,72.99 61.34,74.67 39.62,74.67 36.83,71.88 27.18,71.88 21.01,78.05 v1(10.21,78.05)
  BOTTOM w0.17: R27.2 v1(10.21,78.05)
DKEY1: length 6.9
  BOTTOM w0.17: R13.1 57.91,58.03 57.53,58.41 55.55,58.41 R7.1
DKEY2: length 2.6
  BOTTOM w0.17: R17.1 R8.1
IR-RX: length 64
  TOP w0.17: U1.18 65.46,70.45 63.65,70.45 60.2,73.91 40.13,73.91 37.08,70.86 27.3,70.86 v1(26.8,70.35)
  BOTTOM w0.17: R58.2 38.48,82.04 v1(26.8,70.35)
IR-TX: length 63.4
  TOP w0.17: v1(26.8,69.34) 28.7,69.34 28.96,69.59 37.72,69.59 40.77,72.64 58.93,72.64 64.19,67.38 U1.19
  BOTTOM w0.17: v1(26.8,69.34) 26.16,69.97 26.16,70.73 37.34,81.91 R59.2
M-CTRL: length 53
  TOP w0.17: v1(16.89,77.21) 17.65,76.45 21.72,76.45 26.8,71.37 36.96,71.37 39.88,74.29 60.96,74.29 63.53,71.72 U1.15
  BOTTOM w0.17: R52.1 v1(16.89,77.21)
PA0: length 15.7
  TOP w0.17: U1.1 61.44,89.5 57.79,85.85 R11.2 R10.2
PA1: length 18.5
  TOP w0.17: R15.2 R14.2 58.93,88.13 61.72,90.93 65.3,90.93 U1.2
PA2: length 16.1
  TOP w0.17: R18.2 R19.2 57.66,82.42 61.85,86.61 63.83,86.61 U1.3
PA3: length 18.8
  TOP w0.17: U1.4 65.46,88.23 61.19,88.23 57.66,84.7 R22.2 R21.2
PA6: length 26.7
  TOP w0.17: U1.7 63.35,81.88 58.67,77.21 43.94,77.21 41.33,79.83 R1.1
PA7: length 28.1
  TOP w0.17: R6.1 42.04,77.97 43.18,76.83 59.44,76.83 63.22,80.61 65.46,80.61 U1.8
PA12: length 47.3
  TOP w0.17: v1(22.35,77.84) 27.81,72.38 36.83,72.38 39.62,75.18 61.72,75.18 62.64,74.26 U1.13
  BOTTOM w0.17: v1(22.35,77.84) 22.02,78.17 R31.2
PA13: length 60.2
  TOP w0.17: U1.14 65.46,75.53 60.83,75.53 59.92,76.45 40.13,76.45 36.64,72.96 28.51,72.96 v1(23.62,77.84)
  BOTTOM w0.17: R33.2 C10.2 24.77,78.99 v1(23.62,77.84)
PA19: length 12.8
  BOTTOM w0.17: R13.2 R12.2 59.62,59.86 61.72,61.97 61.72,63.75 63.35,65.37 65.46,65.37 U1.20
PA20: length 10.2
  BOTTOM w0.17: U1.21 62.87,62.71 62.87,60.14 R16.2 R17.2
PA21: length 48.2
  TOP w0.17: U1.22 65.46,65.37 63.91,65.37 57.91,71.37 41.53,71.37 38.48,68.32 30.35,68.32 26.16,64.13 v1(26.16,63.49)
  BOTTOM w0.17: R20.2 v1(26.16,63.49)
PA22: length 51
  TOP w0.17: U1.23 60.83,64.92 60.83,66.8 57.66,69.97 42.04,69.97 39.12,67.05 31.88,67.05 26.92,62.1 24,62.1 v1(22.61,63.49)
  BOTTOM w0.17: v1(22.61,63.49) R23.2
PWM0: length 24.4
  BOTTOM w0.17: U1.9 63.73,79.34 57.66,73.27 55.75,73.27 52.58,70.1 52.58,64.05 R36.2
PWM1: length 22.2
  BOTTOM w0.17: R37.2 53.21,66.97 53.21,69.72 55.94,72.45 57.85,72.45 63.47,78.07 65.46,78.07 U1.10
PWM2: length 13.1
  BOTTOM w0.17: R38.2 54.61,70.22 56.13,71.75 58.29,71.75 63.35,76.8 U1.11
RESET: length 58.1
  TOP w0.17: U1.17 63.65,69.18 59.56,73.27 40.39,73.27 37.34,70.22 v1(28.32,70.22)
  BOTTOM w0.17: U7.14 22.32,56.38 22.6,56.66 R51.2 C18.2 24.21,58.23 24.38,58.41 24.38,65.27 28.07,68.95 28.07,69.97 v1(28.32,70.22)
SD-CLK: length 8.9
  TOP w0.17: v1(50.8,79.62) 50.8,79.7 49.99,80.51 R18.1
  BOTTOM w0.17: SU1.5 51.39,80.55 52.83,79.11 D8.1 52.4,77.77 50.8,79.37 v1(50.8,79.62)
SD-CMD: length 26.3
  TOP w0.17: R10.1 46.99,86.99 45.72,85.72 45.72,83.05 49.78,78.99 55.12,78.99 v1(55.5,78.61)
  BOTTOM w0.17: SU1.3 53.59,80.51 54.86,79.24 55.88,79.24 56.64,78.48 R40.2 D7.1 v1(55.5,78.61)
SD-DATA0: length 21.8
  TOP w0.17: v1(48.39,79.5) 45.09,82.8 45.09,86.1 47.12,88.13 R14.1
  BOTTOM w0.17: v1(48.39,79.5) 48.39,79.29 R39.2 D9.1 51.05,78.35 50.55,78.86 49.66,78.86 49.19,79.32 SU1.7
SD-DET: length 15
  TOP w0.17: v1(48.9,83.31) 49.15,83.56 R21.1
  BOTTOM w0.17: R45.1 46.08,76.65 D10.1 45.9,76.83 45.59,76.83 45.34,77.08 45.34,77.59 45.16,77.77 R44.2 44.7,79.62 43.94,80.38 43.94,82.92 44.32,83.31 v1(48.9,83.31)
SPI1-CLK: length 40.7
  TOP w0.17: R19.1 48.64,82.42 47.12,83.94 v1(47.12,84.83)
  BOTTOM w0.17: R47.1 R20.1 26.74,61.41 26.92,61.59 26.92,65.14 40.26,78.48 40.26,80 42.04,81.78 42.04,82.92 43.94,84.83 v1(47.12,84.83)
SPI1-CS0: length 49
  TOP w0.17: R22.1 49.28,84.7 47.62,86.35 v1(47.24,86.35)
  BOTTOM w0.17: v1(47.24,86.35) 43.56,86.35 27.43,70.22 27.43,69.21 23.62,65.4 23.62,61.72 23.32,61.41 R23.1 21.97,60.77 21.97,58.54 21.66,58.23 R50.2 21.34,57.14 21.62,56.86 U7.13
SPI1-MISO: length 79.6
  TOP w0.17: R15.1 v1(48.9,89.27) ; v1(25.02,60.32) 25.65,60.95 55.63,60.95 56.13,60.45 56.13,58.79 v1(57.15,57.78)
  BOTTOM w0.17: v1(57.15,57.78) 58.04,56.89 R16.1 ; v1(48.9,89.27) 48.13,88.51 48.13,86.23 47.62,85.72 43.69,85.72 28.96,70.99 28.96,68.95 25.02,65.02 v1(25.02,60.32) R53.1
SPI1-MOSI: length 71.4
  TOP w0.17: R11.1 49.53,85.85 v1(49.02,86.35) ; v1(57.02,59.18) 57.02,60.57 56.01,61.59 v1(28.57,61.59)
  BOTTOM w0.17: R48.1 28.57,60.62 v1(28.57,61.59) 28.57,64.76 42.29,78.48 42.29,79.5 43.31,80.51 43.31,83.05 44.07,83.81 48.39,83.81 49.02,84.45 v1(49.02,86.35) ; R12.1 v1(57.02,59.18)
TWI0_SCL: length 95.2
  TOP w0.17: v1(26.8,89.66) 27.18,90.04 27.18,92.83 27.89,93.54 U4.1 ; U1.5 62.71,84.42 56.26,77.97 48.77,77.97 46.86,79.88 45.09,79.88 40.89,84.07 32.89,84.07 30.32,86.64 U3.4 30.32,88.22 v1(30.35,88.26) ; U5.9 6.86,55.49 v1(6.98,55.62)
  BOTTOM w0.17: v1(30.35,88.26) 28.96,89.66 v1(26.8,89.66) 26.67,89.66 25.65,88.64 25.65,76.83 16.51,67.68 16.51,64.64 7.75,55.87 7.24,55.87 v1(6.98,55.62) R25.1
TWI0_SDA: length 95.8
  TOP w0.17: 28.86,90.19 29.67,89.38 U3.3 29.67,86.66 33.4,82.92 41.02,82.92 44.58,79.37 46.61,79.37 48.39,77.59 57.15,77.59 62.71,83.15 65.46,83.15 U1.6 ; 28.86,90.19 U4.7 ; 28.86,90.19 v1(26.92,88.26) ; v1(8.64,55.62) 9.02,55.24 9.02,53.99 8.85,53.82 U5.11
  BOTTOM w0.17: v1(26.92,88.26) 26.29,87.62 26.29,76.19 17.53,67.43 17.53,64.51 v1(8.64,55.62) 8.26,55.24 R26.1
N16775838: length 2.6
  TOP w0.305: U4.3 29.82,94.58 29.97,94.74 30.52,94.74 30.73,94.52 30.73,93.83 U4.4
N16777710: length 7.1
  BOTTOM w0.17: R27.1 R24.1 4.06,82.72 T1.2
N16778707: length 1.8
  BOTTOM w0.254: R37.1 56.4,64.46 Q2.1
N16778732: length 4.3
  TOP w0.305: v1(57.79,68.19) 57.53,67.94 55.31,67.94 D6.6
  BOTTOM w0.305: v1(57.79,68.19) 57.91,68.19 Q3.3
N16778736: length 5.7
  TOP w0.305: v1(57.91,64.38) 57.83,64.46 D6.4
  BOTTOM w0.305: Q1.3 58.93,63.37 v1(57.91,64.38)
N16778741: length 1.8
  BOTTOM w0.254: Q3.1 54.75,68.26 R38.1
N16778781: length 4
  TOP w0.305: v1(57.91,66.03) 55.36,66.03 D6.5
  BOTTOM w0.305: Q2.3 58.29,66.03 v1(57.91,66.03)
N16778794: length 1.8
  BOTTOM w0.254: R36.1 56.4,60.9 Q1.1
N16779519: length 5
  BOTTOM w0.381: U6.1 18.29,83.2 R29.1
N16779567: length 20.1
  TOP w0.17: D5.C 33.31,79.66 33.02,79.37 22.61,79.37 v1(22.35,79.62)
  BOTTOM w0.17: v1(22.35,79.62) 22.02,79.29 R31.1 R30.1 19.56,83.21 U6.4
N16780797: length 6.7
  BOTTOM w0.381: R33.1 R32.1 R35.2 20.8,90.09 R34.1
N16784393: length 4.6
  BOTTOM w0.17: R5.1 D3.1 C2.2 R4.2 R8.2
N16784404: length 2.4
  TOP w0.17: v1(56.13,50.16) 56.06,50.23 DK2.2
  BOTTOM w0.17: R5.2 55.93,50.36 v1(56.13,50.16)
N16793142: length 6.7
  BOTTOM w0.635: R49.1 13.97,87.5 MG1.2
N16793145: length 2.2
  BOTTOM w0.635: R49.2 Q4.3
N16793186: length 3.1
  BOTTOM w0.17: Q4.1 14.92,78.79 15.42,79.29 R52.2
N16793201: length 5.6
  BOTTOM w0.635: MG1.1 13.32,93.26 R46.1
N16811314: length 4.3
  BOTTOM w0.17: R47.2 26.16,57.27 25.12,56.23 U7.18
N16811316: length 4.5
  BOTTOM w0.17: R48.2 27.3,57.27 25.82,55.78 U7.19
N16811421: length 4
  BOTTOM w0.381: U7.27 31.42,56.84 31.11,57.14 C17.2
N16811431: length 4.2
  BOTTOM w0.381: U7.26 30.72,56.65 29.84,57.52 R54.1
N16811468: length 4
  BOTTOM w0.381: C14.2 32.39,56.64 32.12,56.37 U7.28
N16811472: length 4
  BOTTOM w0.381: U7.2 13.92,57.07 13.41,57.58 C15.2
N16811474: length 3.8
  BOTTOM w0.381: U7.3 14.62,58.07 C15.1
N16811480: length 3.9
  BOTTOM w0.381: C16.2 15.7,57.35 15.32,56.97 U7.4
N16811482: length 4.1
  BOTTOM w0.381: C16.1 16.82,57.2 16.02,56.4 U7.5
N16811488: length 4.7
  BOTTOM w0.17: R53.2 23.02,56.23 U7.15
N16813055: length 2.1
  TOP w0.17: D2.C R6.2
N16813242: length 4.3
  TOP w0.381: v1(43.31,87.24) 43.51,87.24 43.89,87.62 U8.3
  BOTTOM w0.381: R56.1 C19.2 43.25,87.29 v1(43.31,87.24)
N16813244: length 4
  TOP w0.381: U8.1 40.01,88.64 v1(39.62,88.26)
  BOTTOM w0.381: v1(39.62,88.26) R57.1 R58.1
N16813276: length 5.3
  BOTTOM w0.508: D11.2 34.54,89.66 Q5.3
N16813278: length 6.5
  BOTTOM w0.508: D11.1 31.62,89.27 R55.1
N16817130: length 3
  BOTTOM w0.17: R59.1 36.12,87.29 35.49,86.67 Q5.1
N16820558: length 3
  TOP w0.17: v1(51.31,50.29) 51.26,50.23 AK1.2
  BOTTOM w0.17: v1(51.31,50.29) 50.85,50.29 R62.1
N16820749: length 11
  BOTTOM w0.17: R61.1 R60.2 C20.2 D12.1 R62.2 R63.2 46.79,51.76 46.61,51.94 43.94,51.94 43.74,51.73 R64.2
N16821069: length 3.1
  TOP w0.17: AK2.2 45.16,50.29 v1(44.07,50.29)
  BOTTOM w0.17: v1(44.07,50.29) 44.96,51.17 R63.1
N16821170: length 3
  TOP w0.17: AK3.2 42.24,50.23 v1(42.42,50.41)
  BOTTOM w0.17: v1(42.42,50.41) 42.62,50.61 R64.1
N16823097: length 4.6
  BOTTOM w0.17: R3.1 D4.1 C1.2 R2.2 R7.2
N16823114: length 7.5
  TOP w0.17: v1(53.72,51.17) 53.98,51.43 58.67,51.43 59.69,50.41 DK1.2
  BOTTOM w0.17: R3.2 v1(53.72,51.17)
N16823959: length 2.2
  TOP w0.17: R1.2 D1.C
N16827041: length 3.4
  BOTTOM w0.17: R45.2 47.12,79.11 46.99,79.24 SU1.9
N16827522: length 5
  BOTTOM w0.17: SU1.1 55.79,80.73 56.13,80.38 56.77,80.38 58.93,78.23 R43.2
N16827527: length 5.5
  BOTTOM w0.17: SU1.2 54.69,80.05 54.99,79.75 56.52,79.75 57.79,78.48 R42.2
N16827532: length 3.7
  BOTTOM w0.17: R41.2 48.26,78.48 47.75,78.99 47.75,79.88 48.09,80.22 SU1.8
N167793910: length 1.9
  TOP w0.381: R28.1 D5.A

## Copper pours and planes (outline as drawn; the poured copper is in the pictures)
GND on TOP: 31.62,66.41 38.73,66.41 39.37,65.78 39.37,62.48 39.24,62.35 31.5,62.35 31.24,62.6 31.24,66.03
GND on TOP: 1.02,48.51 0.66,48.66 0.51,49.02 0.51,94.98 0.66,95.34 1.02,95.49 68.98,95.49 69.34,95.34 69.49,94.98 69.49,49.02 69.34,48.66 68.98,48.51 ; 2 cut-outs
GND on TOP: 24.64,78.48 33.66,78.48 35.43,76.7 38.86,76.7 39.12,76.45 39.12,75.05 38.86,74.8 27.43,74.8 24.51,77.72 24.51,78.35
GND on BOTTOM: 22.35,64.76 25.65,68.07 25.65,70.99 33.91,79.24 33.91,82.04 32.89,83.05 27.43,83.05 27.05,82.67 27.05,75.56 19.05,67.56 19.05,65.4 19.68,64.76
GND on BOTTOM: 69.49,49.02 69.34,48.66 68.98,48.51 1.02,48.51 0.66,48.66 0.51,49.02 0.51,94.98 0.66,95.34 1.02,95.49 68.98,95.49 69.34,95.34 69.49,94.98 ; 3 cut-outs
GND on GND02: 69.49,49.02 69.34,48.66 68.98,48.51 1.02,48.51 0.66,48.66 0.51,49.02 0.51,94.98 0.66,95.34 1.02,95.49 68.98,95.49 69.34,95.34 69.49,94.98
VCC-1V8 on TOP: 18.67,55.11 38.1,55.11 38.99,54.22 59.05,54.22 59.94,55.11 65.15,55.11 65.53,54.73 65.53,52.06 65.21,51.75 53.53,51.75 53.34,51.56 41.66,51.56 41.4,51.3 16.89,51.3 8,60.19 8,61.97 7.11,62.86 5.59,62.86 4.83,63.62 4.83,68.7 4.95,68.83 9.53,68.83 11.68,66.67 11.68,62.1
VCC-3V3 on PWR03: 68.48,49.52 1.52,49.52 1.52,94.48 68.48,94.48
VCC-5V on TOP: 40.01,54.6 58.55,54.6 59.56,55.62 65.02,55.62 65.15,55.75 65.15,58.16 64.77,58.54 59.05,58.54 57.91,57.4 40.77,57.4 38.61,59.56 23.88,59.56 18.03,65.4 18.03,70.35 13.46,74.92 5.21,74.92 5.08,74.8 5.08,70.48 5.33,70.22 10.29,70.22 13.27,67.24 13.27,62.48 19.49,56.25 38.35,56.25

Small or netless copper shapes (teardrops, artwork), in the pictures only: 2 on BOTTOM

## Text on the board
Ref Des/Silkscreen Bottom: 1
Ref Des/Silkscreen Top: 4 | 1 | 2 | 3 | DEV_SUB_SENSOR_BRD_V1_1 | 20170606  L4
DIMENSION: G096C041B0 | F | V-CUT
DISPLAY_BOTTOM: 1 | 2 | 3 | 9 | 10 | 4 | 5 | 8 | 29 | 30 | 6 | 7
User.12: FIGURE | SIZE | 10.0 | 31.5 | 36.0 | 37.4 | 39.37 | 40.16 | 41.34 | 35.43 | DRILL CHART: TOP to BOTTOM | ALL UNITS ARE IN MILS | PLATED | NON-PLATED | QTY | 323 | 2 | 30 | 8 | 10
